# Altium PCB vfd_power_v2.PcbDoc
Units mil, origin at the board's own origin, x right, y up, seen from the top; angles counter-clockwise.
Board outline 6800 x 3920 mil, 2 copper layers (Top Layer, Bottom Layer); 84 components, 44 nets, 249 pads, 17 vias.
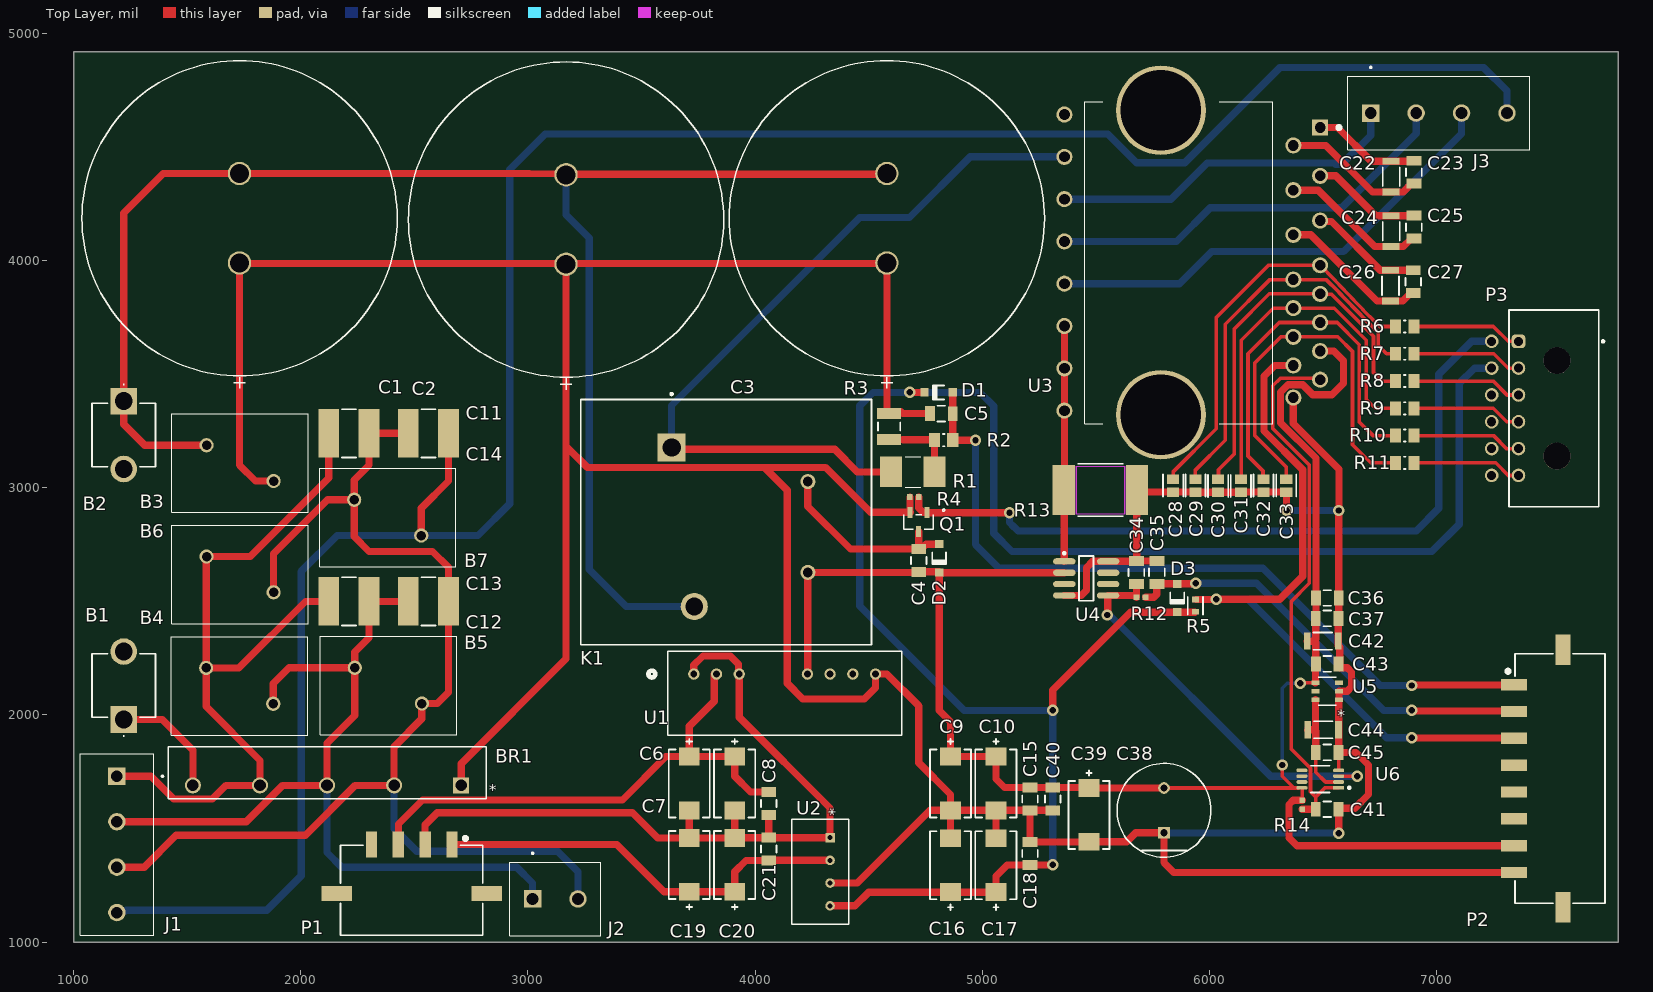
[diagram p0: Top Layer view]
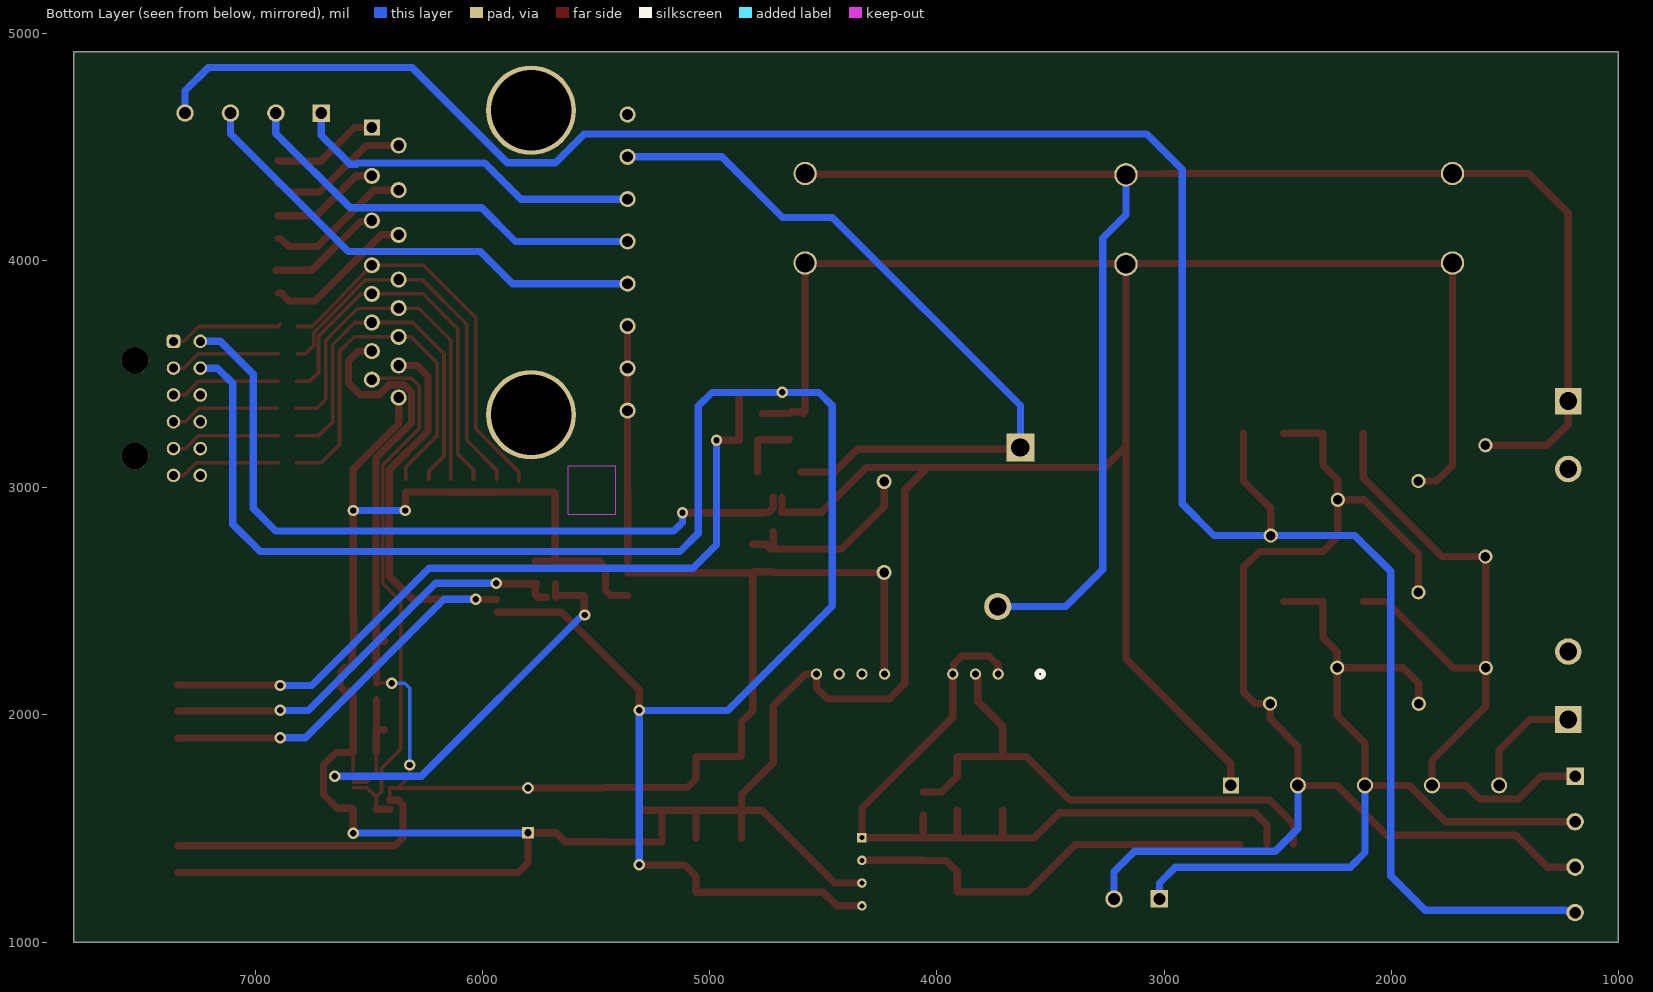
[diagram p1: Bottom Layer view, seen from below]
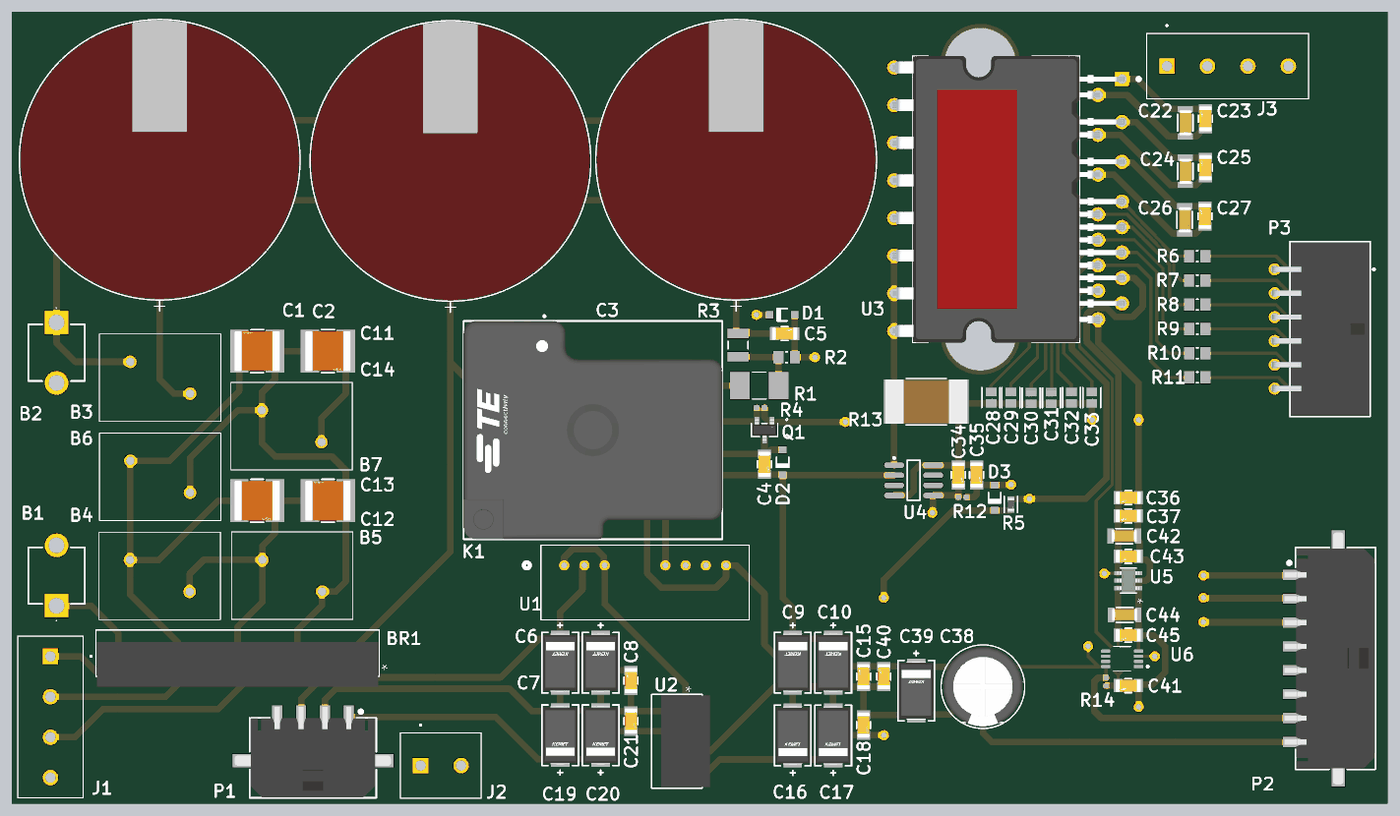
[diagram p2: 3D render of the assembled board from above, using the file's embedded part models]

## Layer stack, top to bottom
Top Solder: solder mask 0.4, Solder Resist, Dk 3.5
Top Layer: signal copper 1.4
Dielectric 1: dielectric 12.6, FR-4, Dk 4.8
Bottom Layer: signal copper 1.4
Bottom Solder: solder mask 0.4, Solder Resist, Dk 3.5

## Board outline
1000,1000 1000,4920 7800,4920 7800,1000

## Design rules (kind name [scope] priority, off if disabled: settings)
Clearance [All] p1: gap=5 ignorepadtopadclearanceinfootprint=FALSE
ComponentClearance [All] p1 off: gap=10 collisioncheckmode=3 verticalgap=10 showdistances=FALSE
DiffPairsRouting [All] p1: maxlimit=13 minlimit=13 mostfreqgap=13 toplayer_minwidth=7.42 toplayer_maxwidth=13 toplayer_prefwidth=7.42 bottomlayer_minwidth=7.42 bottomlayer_maxwidth=13 bottomlayer_prefwidth=7.42 maxuncoupledlength=500
FabricationTestPointUsage TestPointUsage [All] p1: valid=0 allowmultiple=FALSE
FabricationTestpoint Testpoint [All] p1: side=3 testpointundercomponent=TRUE minsize=40 maxsize=100 preferedsize=60 minholesize=20 maxholesize=40 preferedholesize=32 testpointgrid=1 allowsidetop=TRUE allowsidebottom=TRUE usegrid=TRUE gridtolerance=0.01
Height [All] p1 off: minheight=0 maxheight=1000 prefheight=500
HoleSize [All] p1: absolutevalues=TRUE maxlimit=800 minlimit=10 maxpercent=80.000 minpercent=20.000
MatchedLengths MatchedLengths_I210Rx [InNetClass('I210Rx')] p1: tolerance=5 checknetsindiffpair=FALSE checkdiffpairvsdiffpair=TRUE checkxsignals=TRUE checkothers=TRUE
MatchedLengths MatchedLengths_I210Tx [InNetClass('I210Tx')] p2: tolerance=5 checknetsindiffpair=FALSE checkdiffpairvsdiffpair=TRUE checkxsignals=TRUE checkothers=TRUE
MatchedLengths MatchedLengths_mSATARx [InNetClass('mSATARx')] p3: tolerance=25 checknetsindiffpair=FALSE checkdiffpairvsdiffpair=TRUE checkxsignals=TRUE checkothers=TRUE
MatchedLengths MatchedLengths_mSATATx [InNetClass('mSATATx')] p4: tolerance=25 checknetsindiffpair=FALSE checkdiffpairvsdiffpair=TRUE checkxsignals=TRUE checkothers=TRUE
MatchedLengths MatchedLengths_PCIECLK [InNetClass('PCIECLK')] p5: tolerance=25 checknetsindiffpair=FALSE checkdiffpairvsdiffpair=TRUE checkxsignals=TRUE checkothers=TRUE
MatchedLengths MatchedLengths_PCIETx [InNetClass('PCIETx')] p6: tolerance=5 checknetsindiffpair=FALSE checkdiffpairvsdiffpair=TRUE checkxsignals=TRUE checkothers=TRUE
MatchedLengths MatchedLengths_PCIERx [InNetClass('PCIERx')] p7: tolerance=5 checknetsindiffpair=FALSE checkdiffpairvsdiffpair=TRUE checkxsignals=TRUE checkothers=TRUE
MinimumSolderMaskSliver [All] p1: minsoldermaskwidth=5
PlaneConnect [All] p1: planeconnectstyle=Relief reliefexpansion=20 reliefentries=4 reliefconductorwidth=15 reliefairgap=10
PolygonConnect [All] p1: connectstyle=Direct reliefconductorwidth=20 reliefentries=4 polygonreliefangle="90 Angle" airgapwidth=30
RoutingVias [All] p1: holewidth=20 width=40 viastyle="Through Hole" minholewidth=15 minwidth=35 maxholewidth=28 maxwidth=50
SilkToSilkClearance [All] p1: silktosilkclearance=5
SilkToSolderMaskClearance SilkscreenOverComponentPads [IsPad] p1: minsilkscreentomaskgap=5 clearancetoexposedcopper=TRUE
SolderMaskExpansion [All] p1: expansion=4 istentingtop=FALSE
SupplyNets "Schematic Supply Nets_7" [InNet('PGND')] p1: voltage=0.000
SupplyNets "Schematic Supply Nets_6" [InNet('EGND')] p2: voltage=0.000
SupplyNets "Schematic Supply Nets_5" [InNet('15V')] p3: voltage=0.000
SupplyNets "Schematic Supply Nets_1" [InNet('3.3V')] p4: voltage=0.000
SupplyNets "Schematic Supply Nets_3" [InNet('ISO_5V')] p5: voltage=0.000
SupplyNets "Schematic Supply Nets_2" [InNet('ISO_15V')] p6: voltage=0.000
SupplyNets "Schematic Supply Nets" [InNet('GND')] p7: voltage=0.000
Width [All] p1: maxlimit=500 minlimit=5 preferedwidth=32 minimp=50.000000 maximp=50.000000 favimp=50.000000
20 further rules are at their usual default settings.

## Components (designator, comment, footprint, x,y, rotation, side; value= is the part's Value field where it differs from the comment)
B1 "FCLIP1" 01240061H 1220,1980 r90 top
B2 "FCLIP2" 01240061H 1220,3382 r270 top
B3 "470 V" TMOV14RP300E 1732.36,3030 r180 top
B4 "470 V" TMOV14RP300E 1732.36,2697.48 r0 top
B5 "470 V" TMOV14RP300E 2385.16,2207.89 r0 top
B6 "470 V" TMOV14RP300E 1730.64,2049.61 r180 top
B7 "470 V" TMOV14RP300E 2382.36,2790 r180 top
BR1 "GUO40-12NO1" SIP5-GUFP_LTF 2705.83,1690 r180 top
C1 "330 µF" CAP_C30_NCH 1730,3990 r90 top
C2 "330 µF" CAP_C30_NCH 3167.52,3984.19 r90 top
C3 "330 µF" CAP_C30_NCH 4580,3990 r90 top
C4 "0.1 µF" FP-CL31-IPC_C#1 4720,2680.25 r270 top
C5 "0.1 µF" FP-CL31-IPC_C#2 4819.75,3327 r0 top
C6 "47 µF" FP-T521X476M035ATE030-MFG 3710,1698.5 r90 top
C7 "47 µF" FP-T521X476M035ATE030-MFG 3910,1698.5 r90 top
C8 "0.1 µF" FP-CL31-IPC_C#1 4060,1610.25 r90 top
C9 "47 µF" FP-T521X476M035ATE030-MFG 4860,1698.5 r90 top
C10 "47 µF" FP-T521X476M035ATE030-MFG 5060,1698.5 r90 top
C11 "0.01 µF" FP-GRM55D-0_4-IPC_B 2211.4,3240 r180 top
C12 "0.01 µF" FP-GRM55D-0_4-IPC_B 2561.4,2500 r180 top
C13 "0.01 µF" FP-GRM55D-0_4-IPC_B 2211.4,2500 r0 top
C14 "0.01 µF" FP-GRM55D-0_4-IPC_B 2561.4,3240 r0 top
C15 "0.1 µF" FP-CL31-IPC_C#1 5210,1630.25 r90 top
C16 "47 µF" FP-T521X476M035ATE030-MFG 4860,1338.5 r270 top
C17 "47 µF" FP-T521X476M035ATE030-MFG 5060,1338.5 r270 top
C18 "0.1 µF" FP-CL31-IPC_C#1 5210,1390 r270 top
C19 "47 µF" FP-T521X476M035ATE030-MFG 3710,1340 r270 top
C20 "47 µF" FP-T521X476M035ATE030-MFG 3910,1340 r270 top
C21 "0.1 µF" FP-CL31-IPC_C#1 4060,1409.75 r270 top
C22 "10 µF" FP-CGA5L-0_3-0_1-IPC_B 6800.31,4370 r270 top
C23 "0.1 µF" FP-CL31-IPC_C#1 6900.31,4389.75 r90 top
C24 "10 µF" FP-CGA5L-0_3-0_1-IPC_B 6800.31,4130 r270 top
C25 "0.1 µF" FP-CL31-IPC_C#1 6900.31,4147.91 r90 top
C26 "10 µF" FP-CGA5L-0_3-0_1-IPC_B 6797.52,3889.97 r270 top
C27 "0.1 µF" FP-CL31-IPC_C#1 6897.52,3907.64 r90 top
C28 "47pF" FP-CL21-IPC_C 5840,3009.91 r270 top
C29 "47pF" FP-CL21-IPC_C 5938.38,3010 r270 top
C30 "47pF" FP-CL21-IPC_C 6038.38,3008.57 r270 top
C31 "47pF" FP-CL21-IPC_C 6138.38,3008.57 r270 top
C32 "47pF" FP-CL21-IPC_C 6238.38,3010 r270 top
C33 "47pF" FP-CL21-IPC_C 6338.38,3010 r270 top
C34 "0.1 µF" FP-CL31-IPC_C#1 5678.5,2627.41 r270 top
C35 "0.1 µF" FP-CL31-IPC_C#1 5768.5,2627.66 r270 top
C36 "0.1 µF" FP-CL31-IPC_C#1 6519.01,2514.92 r180 top
C37 "0.1 µF" FP-CL31-IPC_C#1 6518.51,2424.92 r180 top
C38 "220 µF" FP-RAD-TH-D_10_0_5-L_16_1-MFG 5800,1580 r90 top
C39 "47 µF" FP-T521X476M035ATE030-MFG 5470,1560 r90 top
C40 "0.1 µF" FP-CL31-IPC_C#1 5310,1630.25 r90 top
C41 "0.1 µF" FP-CL31-IPC_C#1 6518.51,1584.92 r180 top
C42 "10 µF" FP-CGA5L-0_3-0_1-IPC_B 6498.76,2324.92 r0 top
C43 "0.1 µF" FP-CL31-IPC_C#1 6518.76,2224.92 r180 top
C44 "10 µF" FP-CGA5L-0_3-0_1-IPC_B 6500.85,1934.92 r0 top
C45 "0.1 µF" FP-CL31-IPC_C#1 6518.51,1834.92 r180 top
D1 "1N4148W-7-F" DIOD-SOD123-2_V 4807.99,3420 r180 top
D2 "1N4148W-7-F" DIOD-SOD123-2_V 4810,2690 r270 top
D3 "1N4148W-7-F" DIOD-SOD123-2_V 5858.43,2514.57 r270 top
J1 "TB006_-508-04BE" "CUI_TB006 -508-04BE" 1190,1730 r270 top
J2 "TB006_-508-02BE" "CUI_TB006 -508-02BE" 3020,1190 r0 top
J3 "TB006_-508-04BE" "CUI_TB006 -508-04BE" 6710,4650 r0 top
K1 "T9AS1D12-15" FP-T9AS1D12-15-MFG 3872.07,2849.37 r90 top
P1 "662104145021" 662104145021 2487.98,1228.2 r0 top
P2 "662108145021" 662108145021 7543.15,1720 r90 top
P3 "66201221022" 66201221022 7516.22,3349.76 r90 top
Q1 "2N7002-TP" SOT-23_MCC 4720,2850 r180 top
R1 "CRS2512-FX-1004ELF" RESC6432X75N 4694.53,3070 r180 top
R2 "1 kΩ" RESC2013X60X30ML20T20 4829.65,3210 r0 top
R3 "10 kΩ" RESC3225X60X45NL20T20 4590,3270 r270 top
R4 "10 kΩ" RESC1005X40X25ML05T05 4700.31,2960 r0 top
R5 "82 kΩ" FP-RC0603-0_55-IPC_C 5938.43,2481.21 r270 top
R6 "22 Ω" RESC2013X60X30ML20T20 6859.68,3710 r180 top
R7 "22 Ω" RESC2013X60X30ML20T20 6859.65,3590 r180 top
R8 "22 Ω" RESC2013X60X30ML20T20 6860,3470 r180 top
R9 "22 Ω" RESC2013X60X30ML20T20 6860,3350 r180 top
R10 "22 Ω" RESC2013X60X30ML20T20 6860,3230 r180 top
R11 "22 Ω" RESC2013X60X30ML20T20 6860,3110 r180 top
R12 "10 kΩ" RESC1005X40X25ML05T05 5698.5,2517.91 r0 top
R13 "2.5 mΩ" RES_WSLP3921_.002OHM_VIS 5520,2990 r180 top
R14 "10 kΩ" RESC1005X40X25ML05T05 6408.76,1604.61 r90 top
U1 "TMR 2-2413WI" TMR2WI-SINGLE_TRP 3730,2180 r0 top
U2 "NKE0305SC" SIP_NKE_11P5X6_MUR 4330,1460 r270 top
U3 "IKCM30F60GDXKMA1" IC_IKCM30F60GDXKMA1 5924.53,3991.67 r270 top
U4 "MAX4080SASA+T" MAXM-S8+2_M 5457.59,2601.22 r0 top
U5 "LT6654BHS6-1.25TRMPBF" TSOT-23_S6_LIT 6518.76,2104.92 r180 top
U6 "TLV1702AIDGKR" FP-DGK0008A-IPC_C 6488.02,1717.72 r180 top

## Footprints (in the part's own frame and the unit in brackets; to place one, negate y for a bottom-side part, rotate by r counter-clockwise, add the part's x,y. Pads: shape width x height; smd on the part's side, far side on the other; paste and mask are expansions set on the pad)
01240061H [mm]
  rect 2.97x2.97 hole 1.98: 1(0,0)
  round 2.97 hole 1.98: 2(7.6,0)
  silkscreen extent -1.9,-3.55 7.36,3.55
66201221022 [mm] "Dual row Right angle header With plastic peg 12p"
  rrect50% 1.52x1.52 hole 1.02: 1(7.5,3.95)
  round 1.52 hole 1.02: 2(4.5,3.95) 3(1.5,3.95) 4(-1.5,3.95) 5(-4.5,3.95) 6(-7.5,3.95) 7(7.5,6.95) 8(4.5,6.95) 9(1.5,6.95) 10(-1.5,6.95) 11(-4.5,6.95) 12(-7.5,6.95)
  round 3 hole 3 unplated: MH1(-5.34,-0.35) MH2(5.34,-0.35)
  silkscreen extent -11,-5.62 11,5.02, body extent -10.85,-4.95 10.85,7.27, height 8.79
662104145021 [mm] "3.00mm Male Single Row Angled Header, 4p"
  rect 1.27x2.92 smd: 1(4.5,5.12) 2(1.5,5.12) 3(-1.5,5.12) 4(-4.5,5.12)
  rect 3.43x1.65 smd: MP1(-8.395,-0.35) MP2(8.395,-0.35)
  silkscreen extent -7.95,-5.02 7.95,6, body extent -9.82,-4.95 9.82,6.4, height 5.61
662108145021 [mm] "3.00mm Male Single Row Angled Header, 8p"
  rect 1.27x2.92 smd: 1(10.5,5.12) 2(7.5,5.12) 3(4.5,5.12) 4(1.5,5.12) 5(-1.5,5.12) 6(-4.5,5.12) 7(-7.5,5.12) 8(-10.5,5.12)
  rect 3.43x1.65 smd: MP1(-14.395,-0.35) MP2(14.395,-0.35)
  silkscreen extent -13.95,-5.02 13.95,6, body extent -15.82,-4.95 15.82,6.4, height 5.61
CAP_C30_NCH [mil]
  round 103 / inner round 60 / far side round 103 hole 83 paste-99999 mask+0: 1(0,0) 2(393.7,0)
  silkscreen extent -552,-694 891,694, body extent -492,-688 887,688, height 1261
"CUI_TB006 -508-02BE" [mm]
  rect 1.95x1.95 / inner round 1.95 / far side rect 1.95x1.95 hole 1.3: 1(0,0)
  round 1.95 hole 1.3: 2(5.08,0)
  silkscreen extent -2.54,-4.1 7.62,5.2
"CUI_TB006 -508-04BE" [mm]
  rect 1.95x1.95 / inner round 1.95 / far side rect 1.95x1.95 hole 1.3: 1(0,0)
  round 1.95 hole 1.3: 2(5.08,0) 3(10.16,0) 4(15.24,0)
  silkscreen extent -2.54,-4.1 17.78,5.2
DIOD-SOD123-2_V [mm] "SOD123, 2-Leads, Body 2.7x1.55mm, Height 1.45mm"
  rect 0.9x0.95 smd: 1(-1.575,0) 2(1.575,0)
  silkscreen extent -0.64,-0.83 0.64,0.78, body extent -1.35,-0.77 1.35,0.77, height 1.45
FP-CGA5L-0_3-0_1-IPC_B [mm]
  rect 0.756x1.906 smd paste+0 mask+0: 1(-1.725,0) 2(1.725,0)
  silkscreen extent -1.05,-0.95 1.05,0.95, body extent -2.35,-1.2 2.35,1.2, height 0.25
FP-CL21-IPC_C [mil]
  rect 41.52x53.39 smd paste+0 mask+0: 1(-28.57,0) 2(28.57,0)
  silkscreen extent -49,-44 49,44, body extent -53,-32 53,32, height 10
FP-CL31-IPC_C#1 [mil]
  rect 43.52x65.28 smd paste+0 mask+0: 1(-50.25,0) 2(50.25,0)
  silkscreen extent -17,-34 17,34, body extent -76,-38 76,38, height 10
FP-CL31-IPC_C#2 [mil]
  rect 43.52x65.28 smd paste+0 mask+0: 1(-50.25,0) 2(50.25,-1)
  silkscreen extent -17,-34 17,34, body extent -76,-38 76,38, height 10
FP-DGK0008A-IPC_C [mm]
  rect 1.257x0.418 smd paste+0 mask+0: 1(-2.051,0.975)
  rrect100% 1.257x0.418 smd paste+0 mask+0: 2(-2.051,0.325) 3(-2.051,-0.325) 4(-2.051,-0.975) 5(2.051,-0.975) 6(2.051,-0.325) 7(2.051,0.325) 8(2.051,0.975)
  silkscreen extent -3.35,-1.5 1.05,1.5, body extent -2.78,-1.6 2.78,1.6, height 0.25
FP-GRM55D-0_4-IPC_B [mil]
  rect 90.64x212.72 smd paste+0 mask+0: 1(-88.6,0) 2(88.6,0)
  silkscreen extent -31,-106 31,106, body extent -144,-116 144,116, height 10
FP-RAD-TH-D_10_0_5-L_16_1-MFG [mm]
  rect 1.3x1.3 hole 0.8 paste-2539.97 mask+0: 1(-2.5,0)
  round 1.3 hole 0.8 paste-2539.97 mask+0: 2(2.5,0)
  silkscreen extent -5.25,-5.25 5.25,5.25, body extent -5.35,-5.35 5.35,5.35, height 0.25
FP-RC0603-0_55-IPC_C [mil]
  rect 25.93x31.97 smd paste+0 mask+0: 1(-26.64,0) 2(26.64,0)
  silkscreen extent -40,-33 40,33, body extent -44,-22 44,22, height 10
FP-T9AS1D12-15-MFG [mm]
  rect 3.16x3.16 hole 2.06 paste-2539.97 mask+0: 1(8.335,6.095)
  round 3.03 hole 1.98 paste-2539.97 mask+0: 2(-9.445,3.555)
  round 1.69 hole 1.09 paste-2539.97 mask+0: 3(-5.635,-9.145) 4(4.525,-9.145)
  silkscreen extent -13.71,-16.25 14.44,16.25, body extent -13.81,-16.35 13.81,16.35, height 0.25
FP-T521X476M035ATE030-MFG [mm]
  rect 1.99x2.33 smd paste+0 mask+0: 1(-3.01,0) 2(3.01,0)
  silkscreen extent -3.8,-2.3 5,2.3, body extent -4.13,-2.42 4.13,2.42, height 0.25
IC_IKCM30F60GDXKMA1 [mm]
  rect 1.8x1.8 / inner round 1.8 / far side rect 1.8x1.8 hole 1.2: 1(-15.1,14.3)
  round 1.8 hole 1.2: 2(-13.1,11.3) 3(-9.7,14.3) 4(-8.1,11.3) 5(-4.7,14.3) 6(-3.1,11.3) 7(0.3,14.3) 8(1.9,11.3) 9(3.5,14.3) 10(5.1,11.3) 11(6.7,14.3) 12(8.3,11.3) 13(9.9,14.3) 14(11.5,11.3) 15(13.1,14.3) 16(15.1,11.3) 17(16.555,-14.3) 18(11.825,-14.3) 19(7.095,-14.3) 20(2.365,-14.3) 21(-2.365,-14.3) 22(-7.095,-14.3) 23(-11.825,-14.3) 24(-16.555,-14.3)
  round 10.016 hole 9 mask+0: 25(-17.025,-3.5) 26(17.025,-3.5)
  silkscreen extent -18,-12 18,16.6, body extent -18,-14.55 18,14.55, height 5.6
MAXM-S8+2_M [mm] "SOIC, 8-Leads, Body 4.90x3.90mm, Pitch 1.27mm, IPC Low Density"
  oval 2.5x0.7 smd: 1(-2.45,1.905) 2(-2.45,0.635) 3(-2.45,-0.635) 4(-2.45,-1.905) 5(2.45,-1.905) 6(2.45,-0.635) 7(2.45,0.635) 8(2.45,1.905)
  silkscreen extent -2.57,-2.5 0.8,2.93, body extent -2,-2.5 2,2.5, height 1.75
RES_WSLP3921_.002OHM_VIS [mil]
  rect 98x220 smd paste+0 mask+0: 1(-161,0) 2(161,0)
  Top Layer keep-out region: -107,-106 -107,106 105,106 105,-106
  Keep-Out Layer region: -105.5,-105.5 -105.5,105.5 105.5,105.5 105.5,-105.5
  silkscreen extent -100,-115 100,115, body extent -202,-110 202,110, height 47
RESC1005X40X25ML05T05 [mm] "Chip Resistor, 2-Leads, Body 1.00x0.50mm, IPC Low Density"
  rect 0.65x0.65 smd: 1(-0.5,0) 2(0.5,0)
  body extent -0.53,-0.27 0.53,0.28, height 0.4
RESC2013X60X30ML20T20 [mm] "Chip Resistor, 2-Leads, Body 2.00x1.25mm, IPC Low Density"
  rect 1.25x1.55 smd: 1(-1.025,0) 2(1.025,0)
  silkscreen extent -0.1,-0.67 0.1,0.67, body extent -1.1,-0.72 1.1,0.72, height 0.6
RESC3225X60X45NL20T20 [mm] "Chip Resistor, 2-Leads, Body 3.20x2.50mm, IPC Medium Density"
  rect 1.2x2.7 smd: 1(-1.45,0) 2(1.45,0)
  silkscreen extent -0.45,-1.25 0.45,1.25, body extent -1.7,-1.35 1.7,1.35, height 0.6
RESC6432X75N [mm]
  rect 2.46x3.42 smd: 1(-2.425,0) 2(2.425,0)
  silkscreen extent -0.87,-1.7 0.87,1.7
SIP5-GUFP_LTF [mil]
  rect 71x71 / inner round 60 / far side rect 71x71 hole 51 paste-99999 mask+0: 1(0,0)
  round 71 / inner round 60 / far side round 71 hole 51 paste-99999 mask+0: 2(295.28,0) 3(590.55,0) 4(885.83,0) 5(1181.1,0)
  silkscreen extent -109,-171 1291,59, body extent -104,-110 1286,110, height 1142
SIP_NKE_11P5X6_MUR [mil]
  rect 42x42 / inner round 60 / far side rect 42x42 hole 22 paste-99999 mask+0: 1(0,0)
  round 42 / inner round 60 / far side round 42 hole 22 paste-99999 mask+0: 2(100,0) 3(200,0) 4(300,0)
  silkscreen extent -82,-168 382,82, body extent -77,-120 377,120, height 304
SOT-23_MCC [mil]
  rect 22x48 smd paste+0 mask+0: 1(-37.5,-42) 2(37.5,-42) 3(0,42)
  silkscreen extent -115,-57 65,33, body extent -60,-52 60,52, height 49
TMOV14RP300E [mm]
  round 1.59 hole 1.06: 1(-3.75,0) 2(3.75,-4)
  silkscreen extent -7.62,-7.5 7.62,3.5
TMR2WI-SINGLE_TRP [mil]
  round 50 / inner round 60 / far side round 50 hole 30 paste-99999 mask+0: 1(0,0) 2(100,0) 3(200,0) 6(500,0) 7(600,0) 8(700,0) 9(800,0)
  silkscreen extent -200,-270 915,100
TSOT-23_S6_LIT [mil]
  rect 34.5x20 smd paste+0 mask+0: 1(-51.75,37.4) 2(-51.75,0) 3(-51.75,-37.4) 4(51.75,-37.4) 5(51.75,0) 6(51.75,37.4)
  silkscreen extent -40,-62 40,62, body extent -55,-57 55,57, height 39

## Part data
B1 B2: library part 01240061H, "Fuse Clip 40 A - 1 Circuit Cartridge Through Hole", Manufacturer_Name=LITTELFUSE, Mouser Part Number=576-01240061H, Datasheet Link=https://www.littelfuse.com/media?resourcetype=datasheets&itemid=281b065a-d81e-4e26-9035-84e73d4bb028&filename=littelfuse-fuse-clip-124-datasheet.pdf, Geometry.Height=10.67mm, Manufacturer_Part_Number=01240061H, Mouser Price/Stock=https://www.mouser.co.uk/ProductDetail/Littelfuse/01240061H?qs=81r%252BiQLm7BSgqEC6g%252BUS9Q%3D%3D
B3 B4 B5 B6 B7: library part TMOV14RP300E, "Var MOV 300VAC/385VDC 6000A 517V Thru-Hole Radial Bulk", Manufacturer_Name=LITTELFUSE, Mouser Part Number=576-TMOV14RP300E, Datasheet Link=https://www.littelfuse.com/~/media/electronics/datasheets/varistors/littelfuse_varistor_tmov_itmov_datasheet.pdf.pdf, Geometry.Height=22mm, Manufacturer_Part_Number=TMOV14RP300E, Mouser Price/Stock=https://www.mouser.co.uk/ProductDetail/Littelfuse/TMOV14RP300E?qs=nXjUL3qLHyUFvQrdNOF75Q%3D%3D
BR1: "No Description Available", Mfr_Name="Littelfuse Inc", RefDes=RefDes, Type=Type
C1 C2 C3: library part LGW2G331MELC30, "400V", Mfr_Name=Nichicon
C4 C5 C8 C15 C18 C21 C23 C25 C27 C34 C35 C36 C37 C40 C41 C43 C45: library part CMP-13271-001731-1, "Cap Ceramic 100nF 50V X7R ±10% SMD 1206 +125°C Embossed T/R", Capacitance=100nF, Case/Package=1206, Dielectric=X7R, Max Operating Temperature=125°C, Min Operating Temperature=-55°C, Package Quantity=15000, Tolerance=10%, Voltage=50V, Depth=1.6mm, Height=0.85mm, Lead Free="Lead Free", Length=3.2mm, Mount="Surface Mount", Packaging="Tape and Reel", Radiation Hardening=No, Thickness=0.037inch, Voltage Rating=50V, Voltage Rating (DC)=50V, Width=0.063inch
C6 C7 C9 C10 C16 C17 C19 C20 C39: library part CMP-03016-000019-1, "CAP TANT POLY 47UF 35V 2917 /  / 35V", Capacitance=47uF, Case Code (Imperial)=2917, Case Code (Metric)=7343, ESR (Equivalent Series Resistance)=30mR, Max Operating Temperature=125°C, Min Operating Temperature=-55°C, Package Quantity=1, Tolerance=20%, Voltage Rating=35V, Case/Package=2917, Construction=Flat, Depth=4.3mm, Dissipation Factor=10%, Features="General Purpose", Height=4mm, Height - Seated (Max)=0.169inch, Length=7.3mm, Life (Hours)=2000Hour, Mount="Surface Mount", Number of Pins=2, Packaging="Tape and Reel", Polarity=Polar, REACH SVHC="No SVHC", RoHS Compliant=Yes, Series="KO-CAP T521", Termination=SMD/SMT, Voltage Rating (DC)=35V, Width=4.3mm
C11 C12 C13 C14: library part CMP-06035-012355-1, "Chip Multilayer Ceramic Capacitors for General Purpose, 2220, 10000pF, U2J, -750ppm/°C, 5%, 1kV", Capacitance=10nF, Case Code (Imperial)=2220, Case Code (Metric)=5750, Dielectric=U2J, Max Operating Temperature=125°C, Min Operating Temperature=-55°C, Package Quantity=1000, Tolerance=5%, Voltage Rating=1kV, Case/Package=2220, Height=2mm, Length=0.224inch, Mount="Surface Mount", Packaging="Tape and Reel", Termination=SMD/SMT, Thickness=0.087inch, Voltage Rating (DC)=1kV, Width=0.197inch
C22 C24 C26 C42 C44: library part CMP-08246-000748-1, "Cap Ceramic 10uF 25V X7R 10% Pad SMD 1206 +125°C Automotive T/R", Capacitance=10uF, Case Code (Imperial)=1206, Case Code (Metric)=3216, Dielectric=X7R, Max Operating Temperature=125°C, Min Operating Temperature=-55°C, Package Quantity=2000, Ratings=AEC-Q200, Tolerance=10%, Voltage Rating=25V, Case/Package=1206, Composition=Ceramic, Depth=1.6mm, Height=1.6mm, Length=3.2mm, Mount="Surface Mount", Packaging="Tape and Reel", Termination=SMD/SMT, Thickness=0.071inch, Voltage Rating (DC)=25V, Weight=0.000571oz, Width=1.6mm
C28 C29 C30 C31 C32 C33: library part CMP-13271-002187-1, "CL21 Series 0805 47pF 50V ±5% Tolerance C0G Multilayer Ceramic Chip Capacitor", Case/Package=0805, Dielectric=C0G, Max Operating Temperature=125°C, Min Operating Temperature=-55°C, Package Quantity=10000, Temperature Coefficient=300ppm/°C, Tolerance=5%, Voltage=50V, Capacitance=47pF, Depth=1.25mm, Height=0.65mm, Length=2mm, Material=Ceramic, Mount="Surface Mount", Packaging="Tape and Reel", Radiation Hardening=No, Thickness=0.03inch, Voltage Rating=50V, Voltage Rating (DC)=50V, Width=0.049inch
C38: library part CMP-05427-000403-1, "Aluminum Electrolytic Capacitors (Radial Lead Type) 220uF ±20% 50V", Capacitance=220uF, Case/Package=Radial, ESR (Equivalent Series Resistance)=30mR, Max Operating Temperature=105°C, Min Operating Temperature=-40°C, Package Quantity=1, Ripple Current=1.65A, Tolerance=20%, Voltage Rating=50V, Contact Plating=Tin, Diameter=10mm, Features="General Purpose", Height=16mm, Height - Seated (Max)=0.689inch, Impedance=30mR, Lead Diameter=0.6mm, Lead Free="Lead Free", Lead Pitch=5mm, Length=16mm, Life (Hours)=8000Hour, Mount="Through Hole", Number of Pins=2, Packaging="Ammo Pack", Radiation Hardening=No, REACH SVHC="No SVHC", RoHS Compliant=Yes, Series=FR, Termination=Radial, Voltage Rating (DC)=50V
D1 D2 D3: library part CMP-2000-04932-2, "Fast Switching Diode, 100 V, 0.15 A, -65 to 150 degC, 2-Pin?SOD123, RoHS, Tape and Reel", If - Forward Current=0.15A, Ir - Reverse Current=1uA, Manufacturer=DiodesIncorporated, Max Surge Current=2A, Maximum Operating Temperature=+150C, Minimum Operating Temperature=-65C, Operating Temperature Range=-65Cto+150C, Package / Case=SOD-123, Package Reference=SOD123-2, Peak Reverse Voltage=100V, Vf - Forward Voltage=1.25V, Brand=DiodesIncorporated, Configuration=Single, Datasheet URL=http://www.farnell.com/datasheets/1915529.pdf, Datasheet Version="Rev. 24-2, 10/2013", Factory Pack Quantity=3000, Height=1.25mm, Length=2.85mm, Manufacturer URL=http://www.diodes.com/, Mounting Style=SMD/SMT, Package URL=http://www.diodes.com/datasheets/ds18004.pdf, Packaging=Reel, Product=SwitchingDiodes, Product Category=Diodes-GeneralPurpose,Power,Switching, Recovery Time=4ns, RoHS=True, Series=1N4148, Type=SwitchingDiode, Unit Weight=0.000353oz, Width=1.7mm
J1 J2 J3: "2~24 Poles, Screw Type, Horizontal, 5.08 Pitch, 26~14 (AWG), Terminal Block Connector", Package=None, Availability="In Stock", CUI_purchase_URL=https://www.cuidevices.com/product/interconnect/connectors/terminal-blocks/tb006-508-series?utm_source=snapeda.com&utm_medium=referral&utm_campaign=snapedaBOM, MF="CUI Devices", Price=None
  J1 J3: Check_prices=https://www.snapeda.com/parts/TB006%20-508-04BE/CUI+Devices/view-part/?ref=eda, MP="TB006 -508-04BE", Purchase-URL="https://pricing.snapeda.com/search/part/TB006 -508-04BE/?ref=eda", SnapEDA_Link=https://www.snapeda.com/parts/TB006%20-508-04BE/CUI+Devices/view-part/?ref=snap
  J2: Check_prices=https://www.snapeda.com/parts/TB006%20-508-02BE/CUI+Devices/view-part/?ref=eda, MP="TB006 -508-02BE", Purchase-URL="https://pricing.snapeda.com/search/part/TB006 -508-02BE/?ref=eda", SnapEDA_Link=https://www.snapeda.com/parts/TB006%20-508-02BE/CUI+Devices/view-part/?ref=snap
K1: library part CMP-03395-000224-1, "RELAY GEN PURPOSE SPST 30A 15V", Coil Current=67mA, Coil Power=1W, Coil Resistance=225R, Coil Voltage (DC)=15V, Contact Current Rating=30A, Contact Voltage Rating (AC)=277V, Max Operating Temperature=85°C, Min Operating Temperature=-55°C, Package Quantity=50, Coil Type=Non-Latching, Contact Material=Silver, Depth=27.43mm, ELV=Non-Compliant, Height=20.4mm, Lead Free="Lead Free", Length=32.5mm, Max Voltage Rating (AC)=277V, Mount="Through Hole", Number of Pins=4, Operate Time=15ms, Packaging=Bulk, Power Consumption=1W, Radiation Hardening=No, Relay Type="General Purpose", Release Time=15ms, RoHS Compliant=Yes, Series=T9A, Termination=PCB, Throw Configuration=SPST, Weight=0.918oz, Width=27.4mm
P1: library part CMP-1502-00484-2, Color=Black, Contact Resistance=10mΩ, Current Rating=5A, Insulation Resistance=1GΩ, Max Operating Temperature=105°C, Min Operating Temperature=-40°C, Operating Supply Voltage=250V, Connector Type="Male Pin, Socket", Contact Material=Copper, Contact Plating=Tin, Fastening Type=Ramp, Gender=Male, Height=14mm, Lead Pitch=3mm, Length=15.65mm, Mount="Surface Mount", NexarPartId=23024783, Number of Contacts=4, Number of Pins=4, Number of Positions=4, Number of Rows=1, Packaging="Tape and Reel", Pitch=3mm, REACH SVHC=Unknown, RoHS=Compliant, Termination=Solder, Width=6.85mm
P2: library part CMP-1502-00488-2, Color=Black, Contact Resistance=10mΩ, Current Rating=5A, Insulation Resistance=1GΩ, Max Operating Temperature=105°C, Min Operating Temperature=-40°C, Operating Supply Voltage=250V, Connector Type="Male Pin, Socket", Contact Material=Copper, Contact Plating=Tin, Fastening Type=Ramp, Gender=Male, Height=14mm, Lead Pitch=3mm, Length=27.65mm, Mount="Surface Mount", NexarPartId=23024787, Number of Contacts=8, Number of Pins=8, Number of Positions=8, Number of Rows=1, Packaging="Tape and Reel", Pitch=3mm, REACH SVHC=Unknown, RoHS=Compliant, Termination=Solder, Width=12.85mm
P3: library part CMP-1502-00369-2, Color=Black, Contact Resistance=10mΩ, Current Rating=5A, Insulation Resistance=1GΩ, Max Operating Temperature=105°C, Min Operating Temperature=-40°C, Operating Supply Voltage=250V, Connector Type="Male Pin, Socket", Contact Material=Copper, Contact Plating=Tin, Fastening Type=Latch, Gender=Male, Height=8.9mm, Lead Pitch=3mm, Length=21.7mm, Mount="Through Hole", NexarPartId=23024718, Number of Contacts=12, Number of Pins=12, Number of Positions=12, Number of Rows=2, Pitch=3mm, REACH SVHC=Unknown, RoHS=Compliant, Row Spacing=2.9972mm, Termination=Solder, Width=21.7mm
Q1: "No Description Available", Mfr_Name=MCC, Type=Transistors
R1: Package=None, Availability=Unavailable, MP=CRS2512-FX-1004ELF, Price=None
R2: library part CMP-2001-04656-1, "±5%", Manufacturer="KOA Speer", Part Number=RK73B2ATTD102J
R3: library part CMP-2005-01993-1, "±1%, 0.5W", Manufacturer="Vishay Dale", Part Number=CRCW121010K0FKEA
R4 R12 R14: library part CMP-2002-01181-1, "±5%", Manufacturer=Panasonic, Part Number=ERT-J0EM103J
R5: library part CMP-03412-048229-1, "RES 82K OHM 5% 1/10W 0603", Case Code (Imperial)=0603, Case Code (Metric)=1608, Max Operating Temperature=155°C, Max Power Dissipation=100mW, Min Operating Temperature=-55°C, Package Quantity=1, Resistance=82kR, Resistance Tolerance=5%, Resistor Type="Thick Film", Temperature Coefficient=100ppm/°C, Voltage Rating=75V, Voltage Rating (DC)=50V, Case/Package=0603, Construction=Rectangular, Depth=0.8mm, Features="Moisture Resistant", Height=0.022inch, Lead Free="Lead Free", Length=0.063inch, Military Standard=Not, Number of Pins=2, Number of Terminations=2, Packaging="Tape and Reel", Power Rating=100mW, REACH SVHC="No SVHC", RoHS Compliant=Yes, Series=RC, Size Code=0603, Termination=SMD/SMT, Tolerance=5%, Weight=7.1E-05oz, Width=0.8mm
R6 R7 R8 R9 R10 R11: library part CMP-2001-04578-1, Manufacturer="KOA Speer", Part Number=RK73B2ATTD220J
R13: library part WSLP39212L500FEA, "±1%, 5W", Mfr_Name=Vishay
U1: library part CMP-01539-55835505-1, "TMR 2-2413WI Module DC-DC 24VIN 1-OUT 15V 135A 2W 7-Pin SIP", Case/Package=SIP, Isolation Voltage=1.5kV, Max Operating Temperature=85°C, Min Operating Temperature=-40°C, Nominal Input Voltage=24V, Output Current=135A, Output Power=2W, Output Voltage=15V, Depth=9.3mm, Isolation=Isolated, Length=26mm, Mount="Through Hole", NexarPartId=55835505, Number of Outputs=1, Number of Pins=7, Radiation Hardening=No, RoHS=Compliant
U2: "No Description Available", Mfr_Name=Murata, RefDes=RefDes, Type=Type
U3: "Fully isolated Dual In-Line molded module", Package="PowerDIP-24 Infineon", Availability="In Stock", Check_prices=https://www.snapeda.com/parts/IKCM30F60GDXKMA1/Infineon+Technologies/view-part/?ref=eda, MF="Infineon Technologies", MP=IKCM30F60GDXKMA1, Price=None, Purchase-URL=https://pricing.snapeda.com/search?q=IKCM30F60GDXKMA1&ref=eda, SnapEDA_Link=https://www.snapeda.com/parts/IKCM30F60GDXKMA1/Infineon+Technologies/view-part/?ref=snap
U4: library part CMP-0252-00176-1, "76 V, High-Side, Uni-directional Current-Sense Amplifier, 60 V / V Gain, -40 to 125 degC, 8-Pin SOIC (S8+2), Pb-Free, Tape and Reel", Bi-Dir. Curr. Sense=No, Code_JEDEC=MS012, ComponentLink1Description="Manufacturer URL", ComponentLink1URL=http://www.maximintegrated.com/, ComponentLink2Description=Datasheet, ComponentLink2URL=http://datasheets.maximintegrated.com/en/ds/MAX4080-MAX4081.pdf, ComponentLink3Description="Package Specification", ComponentLink3URL=http://pdfserv.maximintegrated.com/package_dwgs/21-0041.PDF, DatasheetVersion="Rev. 4", Gain="5 V/V, 20 V/V ,60 V/V", Industry Qualified="Automotive - AECQ100, Automotive - General", Mounting Technology="Surface Mount", PackageDescription="8-Pin Small-Outline IC, Narrow (0.15in) (S8+2), Body 4.90 x 3.90 mm, Pitch 1.27 mm", PackageReference=S8+2, PackageVersion="Rev. D, 10/2012", PartNumber=MAX4080SASA+T
U5: "No Description Available", Mfr_Name="Analog Devices Inc", RefDes=RefDes, Type=Type
U6: library part CMP-04896-000101-1, "IC COMPARATOR DUAL 8VSSOP", Case/Package=VSSOP, Input Bias Current=15nA, Input Offset Voltage (Vos)=3.5mV, Max Dual Supply Voltage=18V, Max Operating Temperature=125°C, Max Supply Voltage=36V, Min Dual Supply Voltage=1.1V, Min Operating Temperature=-40°C, Min Supply Voltage=2.2V, Nominal Supply Current=55uA, Output Current=20mA, Package Quantity=2500, Power Supply Rejection Ratio (PSRR)=-96.48dB, Quiescent Current=75uA, Contact Plating=Gold, Lead Free="Lead Free", Max Input Current=15nA, Mount="Surface Mount", Number of Channels=2, Number of Elements=2, Number of Pins=8, Packaging="Tape and Reel", Propagation Delay=560ns, REACH SVHC="No SVHC", Response Time=780ns, RoHS Compliant=Yes, Series=-, Type="General Purpose"

## Via types
v1: diameter 50, hole 28, Top Layer to Bottom Layer, 17 vias

## Nets (pads, with @x,y where several pads share a name; then routed paths per layer and width w, separated by ;. In a path a pad name is that pad's centre, name@x,y a point inside that pad or via, vN(x,y) a via of type N, cw(c..) or ccw(c..) an arc to the next point about the centre after c; other vN are vias at no path point)
3.3V: C19.2 C20.2 C21.2 P1.1 U2.2 | length 1860.3
  Top Layer w32: P1.1 3390.22,1429.78 3598.5,1221.5 C19.2 C20.2 3910,1310 3959.5,1359.5 C21.2 4060.5,1360 U2.2
15V: C6.2 C7.2 C8.2 P1.3 U1.2 | length 2360.9
  Top Layer w32: P1.3@2430,1429.78 2430,1520 2536,1626 3416,1626 3607.01,1817.01 C6.2 3710,1950 3820,2060 U1.2@3820,2180 ; C6.2@3716.69,1817.01 C7.2 3910,1730 3979.5,1660.5 C8.2
+_VIN: B1.1 BR1.5 | length 515.8
  Top Layer w32: B1.1 1390,1980 1524.72,1845.28 BR1.5
EGND: B7.1 C14.2 J1.4 J3.4 | length 10052.3
  Top Layer w32: B7.1 2530,2910 2650,3030 C14.2
  Bottom Layer w32: J1.4 1198.57,1138.57 1229.7,1138.57 1231.13,1140 1850,1140 2002.12,1292.12 2002.12,2632.12 2160,2790 B7.1 2780,2790 2920,2930 2920,4401.25 3076.21,4557.47 5552.53,4557.47 5678.81,4431.19 5891.19,4431.19 6310,4850 7208.12,4850 7310,4748.12 J3.4
GND: C6.1 C7.1 C8.1 C19.1 C20.1 C21.1 P1.2 U1.1 U1.3 U2.1 | length 3480.8
  Top Layer w32: P1.2 2547.04,1517.04 2600,1570 3460,1570 3571.49,1458.51 C19.1 ; C6.1 C19.1 ; U1.1 3730,2220 3770,2260 3890,2260 3926.56,2223.44 3926.56,2183.44 U1.3 3930,1990 4330,1590 U2.1 C21.1 ; C7.1 C20.1 ; C8.1 C21.1 ; C19.1 C20.1 ; C20.1 3911.5,1460 C21.1
HIN(U): C28.1 R6.2 U3.7 | length 1795.6
  Top Layer w16: C28.1@5840,3030 C28.1 5840,3070 6030,3260 6030,3750 6259.85,3979.85 U3.7 6488.4,3980.7 6493.07,3976.03 6699.48,3760 6699.6,3759.88 ; 6699.6,3759.87 6704.29,3755.19 6749.48,3710 R6.2@6816.38,3710
HIN(V): C29.1 R7.2 U3.8 | length 1733.5
  Top Layer w16: C29.1 5938.38,3078.38 6070,3210 6070,3720 6266.86,3916.86 U3.8 6491.81,3916.86 6513.32,3916.86 6535.15,3895.03 6535.66,3895.03 6541.57,3889.12 6709.44,3716.92 6710.38,3715.93 6710.51,3715.8 6727.62,3698.68 6729.07,3697.25 6731.63,3694.72 6743.26,3683.09 6743.26,3626.74 6780,3590 R7.2@6816.34,3590
HIN(W): C30.1 R8.2 U3.9 | length 1718.1
  Top Layer w16: C30.1@6039.7,3037.15 6039.7,3079.7 6110,3150 6110,3700 6263.87,3853.87 U3.9 6488.97,3852.42 6537.58,3852.42 6722.26,3667.74 6722.26,3507.74 6760,3470 R8.2
ISO_5V: C16.2 C17.2 C18.2 D1.2 D3.2 P3.8 R5.2 U2.4 | length 8744.4
  Top Layer w10: C18.2 C18.2@5210.25,1340
  Top Layer w32: U2.4 4440,1160 4500,1220 C16.2 C17.2 5060,1290 5109.75,1339.75 C18.2 ; v1(4680,3420) D1.2 ; C18.2@5210.25,1340 v1(5310,1340) ; v1(5310,2020) 5310,2110 5652.56,2452.56 D3.2 R5.2@5936.42,2452.56
  Bottom Layer w32: v1(5310,1340) v1(5310,2020) 4920,2020 4460,2480 4460,3360.89 4519.11,3420 v1(4680,3420) 4990,3420 5050,3360 5050,2800 5130.67,2719.33 6979.33,2719.33 7100,2840 7100,3460 7166.93,3526.93 P3.8
ISO_15V: C4.2 C9.2 C10.2 C15.2 C36.2 C37.2 C38.2 C39.2 C40.2 C42.1 C43.2 D2.2 K1.3 P2.7 R14.2 U1.6 U3.13 U4.2 U5.4 U6.8 | length 7912.4
  Top Layer w10: D2.2 D2.2@4811.77,2626.22
  Top Layer w16: C38.2 U6.8@6389.74,1678.43 ; v1@6320.45,1779.55 6320.45,1730 6371.03,1679.42 6406.07,1679.42 U6.8@6406.37,1679.12 ; v1@6401.16,2141.16 U5.4@6465.85,2141.16 ; U6.8@6408.18,1678.43 6408.76,1677.85 R14.2
  Top Layer w32: U1.6 4231.06,2181.06 4231.06,2626.47 K1.3 4717.52,2627.52 C4.2 4807.99,2630 D2.2 4810,2020 4860,1970 C9.2 C10.2 5060,1718.19 5097.69,1680.5 C15.2 C40.2 5468.01,1680.5 C39.2 5470.08,1678.43 C38.2 ; D2.2@4811.77,2626.22 U4.2 ; v1(6320,1780) v1@6320.45,1779.55 ; v1(6400,2140) v1@6401.16,2141.16 ; R14.2 6368.75,1624.29 6350,1605.55 6350,1460 6385.28,1424.72 P2.7 ; C42.1 6458.76,2324.92 ; U5.4@6465.85,2141.16 U5.4 6467.01,2223.46 C43.2 6468.49,2319.06 6462.63,2324.92 6458.76,2324.92 ; U3.13 6548.1,3601.9 6590,3560 6590,3460 6540,3410 6455.01,3410 6411.4,3453.61 6346.04,3453.61 6312.98,3420.55 6312.98,3287.02 6468.76,3131.24 C36.2 6468.76,2425.42 C37.2 6468.26,2334.42 6458.76,2324.92
  Bottom Layer w16: v1(6320,1780) 6320,2117.45 6342.55,2140 v1(6400,2140)
ITRIP: C41.2 R14.1 U3.15 U6.1 | length 2410.6
  Top Layer w16: C41.2 6468.26,1638.9 ; U3.15 6480.83,3482.61 6312.61,3482.61 6278.86,3448.86 6278.86,3261.14 6439.76,3100.24 6439.76,2579.76 6360,2500 6360,1849.91 6445.01,1764.9 6445.01,1662.15 6468.26,1638.9 ; U6.1 6508.69,1679.33 6468.26,1638.9
  Top Layer w32: R14.1 C41.2
ITRIP+: C34.2 R12.1 U4.5 U6.3 | length 1750.3
  Top Layer w16: U6.3 v1@6649.49,1730.51
  Top Layer w32: v1(5550,2440) 5552.02,2442.02 5552.02,2524.2 U4.5 5670.51,2526.22 R12.1 5678.82,2576.84 C34.2
  Bottom Layer w32: v1(5550,2440) 5554.87,2440 5563.87,2431 5569,2431 6270,1730 v1(6650,1730)
LIN(U): C31.1 R9.2 U3.10 | length 1688.7
  Top Layer w16: C31.1@6140,3037.15 6140,3650 6280.88,3790.88 U3.10 6549.12,3790.88 6690,3650 6690,3390 6730,3350 R9.2@6822.6,3350
LIN(V): C32.1 R10.2 U3.11 | length 1689
  Top Layer w16: C32.1 6236.04,3040.91 6236.04,3073.96 6170,3140 6170,3590 6307.89,3727.89 U3.11 6562.11,3727.89 6660,3630 6660,3290 6720,3230 R10.2@6816.69,3230
LIN(W): C33.1 R11.2 U3.12 | length 1706
  Top Layer w16: C33.1 6338.38,3091.62 6200,3230 6200,3550 6314.89,3664.89 U3.12 6565.11,3664.89 6630,3600 6630,3190 6710,3110 R11.2
NetB2_1: B2.1 B3.2 C1.2 C2.2 C3.2 K1.2 | length 7080.6
  Top Layer w32: B3.2 1312.52,3187.48 1220,3280 B2.1 1220,4210 1393.7,4383.7 C1.2 3005.16,4383.7 3163.56,4381.85 C2.2 3170.43,4380.79 4577.09,4380.79 C3.2 ; K1.2@3730.88,2478.76 K1.2
  Bottom Layer w32: C2.2 3167.52,4202.48 3270,4100 3270,2640 3432.48,2477.52 K1.2
NetC4_1: C4.1 D2.1 K1.4 Q1.3 | length 851.5
  Top Layer w32: K1.4 4232.11,2917.89 4419.5,2730.5 C4.1 ; Q1.3 C4.1 ; D2.1 4752.39,2752.01 4730.88,2730.5 C4.1
NetC44_1: C44.1 C45.2 U5.6 U6.2 | length 471.6
  Top Layer w16: C45.2 6468.26,1748.07 6511.41,1704.92 U6.2
  Top Layer w32: C44.1 6462.4,1934.92 ; U5.6 6467.01,1939.53 6462.4,1934.92 ; C45.2 6468.26,1929.06 6462.4,1934.92
NetR1_1: R1.1 R2.1 R3.2 | length 280.8
  Top Layer w32: 4650,3212.91 4651.46,3211.46 4787.83,3211.46 R2.1 4789.29,3070.71 R1.1
NU_NV_NW_RS+: R13.2 U3.17 U3.18 U3.19 U4.1 | length 1038.1
  Top Layer w10: R13.2@5361.14,2987.86 R13.2 R13.2@5361.54,2992.54
  Top Layer w32: U4.1 R13.2@5361.14,2987.86 ; R13.2@5361.54,2992.54 U3.17 U3.18 U3.19
OUT0: P3.1 R6.1 | length 501.3
  Top Layer w16: R6.1@6890.35,3719.68 R6.1 7250,3710 7314.96,3645.04 P3.1
OUT1: P3.2 R7.1 | length 486.8
  Top Layer w16: R7.1 7251.9,3590 7314.97,3526.93 P3.2
OUT2: P3.3 R8.1 | length 485.7
  Top Layer w16: R8.1 7249.24,3470 7310.42,3408.82 P3.3
OUT3: P3.4 R9.1 | length 482
  Top Layer w16: R9.1@6903.31,3350 7250,3350 7309.29,3290.71 P3.4
OUT4: P3.5 R10.1 | length 484.1
  Top Layer w16: R10.1 7250.39,3230 7307.8,3172.6 P3.5
OUT5: P3.6 R11.1 | length 486.3
  Top Layer w16: R11.1@6897.4,3110 7260,3110 7315.51,3054.49 P3.6
OUT6: P3.7 Q1.1 R4.2 | length 3325.2
  Top Layer w32: R4.2 4720,2911.33 4739.83,2891.5 4758,2891.5 Q1.1 ; Q1.1@4762.5,2890 v1(5120,2890)
  Bottom Layer w32: v1(5120,2890) 5120,2847.49 5138.75,2828.75 5140,2828.75 5158.75,2810 6910,2810 7010,2910 7010,3500 7155.04,3645.04 P3.7
P: K1.1 R1.2 U3.23 | length 3379.1
  Top Layer w32: K1.1 3639.64,3170 4350,3170 4450,3070 R1.2
  Bottom Layer w32: K1.1 3632.11,3362.11 4460,4190 4680,4190 4947.22,4457.22 U3.23
PGND: B3.1 BR1.1 C1.1 C2.1 C3.1 C5.1 C9.1 C10.1 C15.1 C16.1 C17.1 C18.1 C28.2 C29.2 C30.2 C31.2 C32.2 C33.2 C34.1 C35.1 C36.1 C37.1 C38.1 C39.1 C40.1 C41.1 C42.2 C43.1 C44.2 C45.1 P2.8 Q1.2 R3.1 R4.1 R13.1 U1.9 U2.3 U3.16 U4.4 U4.8 U5.1 U5.2 U6.4 | length 19944.6
  Top Layer w10: R4.1 R4.1@4681.56,2959.07 ; Q1.2@4681.56,2892.93 Q1.2 ; C34.1 5678.63,2677.78 C34.1@5679.5,2678.66 ; R13.1@5681,2980 R13.1
  Top Layer w16: U6.4 C45.1@6568.76,1824.04
  Top Layer w32: B3.1 1800,3030 1730,3100 C1.1 1732.91,3987.09 3164.61,3987.09 C2.1 ; BR1.1 2705.83,1785.83 3167.52,2247.52 3167.52,3183.05 ; U2.3 4450,1260 4770,1580 C9.1 ; R3.1 4587.62,3327.09 R3.1@4580,3334.71 ; Q1.2@4681.56,2892.93 R4.1@4681.56,2959.07 ; Q1.2 4508,2892 4310,3090 4040,3090 ; C5.1 C5.1 4650.04,3327.04 4642.38,3334.71 R3.1@4580,3334.71 ; C16.1 C9.1 ; C17.1 C10.1 ; C40.1@5309.68,1580.32 C40.1 C15.1 ; U4.4 5436.22,2526.22 5458.69,2548.69 5458.69,2648.69 5486.22,2676.22 U4.8 C34.1@5677.07,2676.22 ; C39.1 5468.75,1440.25 C18.1 C15.1 ; C39.1@5476.69,1441.5 5635.56,1441.5 5675.64,1481.57 C38.1 5800,1350 5843.39,1306.61 P2.8 ; C34.1@5678.63,2677.78 5768.38,2677.78 C35.1 ; C34.1@5679.5,2678.66 5679.5,2977.09 5683.75,2981.33 C28.2 5840.05,2981.38 5938.33,2981.38 C29.2 5939.8,2980 C30.2 C31.2 6139.8,2981.43 C32.2 C33.2 6339.19,2980.61 6339.19,2900.81 v1(6340,2900) ; U3.16 6369.41,3282.91 6570,3082.33 v1(6570,2900) 6569.63,2899.63 6569.63,2515.29 C36.1 6569.26,2425.42 C37.1 6566.67,2422.84 C42.2 6566.67,2304.51 6573.42,2297.77 6573.42,2229.33 C43.1 ; C43.1@6569.01,2214.04 6574.77,2208.28 6606.42,2208.28 6625.16,2189.53 6625.16,2123.67 6606.42,2104.92 U5.2 U5.1 6568.76,2065.77 C44.2 C45.1 6645.08,1834.92 6700,1780 6700,1650 6639.78,1589.78 6573.62,1589.78 C41.1 6569.38,1584.3 6569.38,1480.62 v1(6570,1480) ; 3167.52,3183.05 C2.1 ; 3167.52,3183.05 3260.57,3090 4040,3090 ; C2.1 3170.43,3987.09 4577.09,3987.09 C3.1 R3.1@4580,3334.71 ; 4040,3090 4140.78,2989.22 4140.78,2139.22 4210,2070 4480,2070 4530,2120 U1.9 4580,2180 4720,2040 4720,1790 4860,1650 C9.1 ; C9.1 C10.1 ; C10.1 C15.1
  Bottom Layer w32: C38.1@5800,1480 v1(6570,1480) ; v1(6340,2900) v1(6570,2900)
U: J3.1 U3.22 | length 1568
  Bottom Layer w32: U3.22 5831,4271 5989.99,4429.99 6549.99,4429.99 6555.94,4424.04 6582.45,4424.04 6710,4551.59 J3.1
V: J3.2 U3.21 | length 1835.3
  Bottom Layer w32: U3.21 5854.78,4084.78 6003.14,4233.14 6583.14,4233.14 6910,4560 J3.2
VB(U): C22.2 C23.1 U3.2 | length 631.9
  Top Layer w32: U3.2 6512.59,4507.41 6717.91,4302.09 6852.84,4302.09 6872.67,4321.92 6872.67,4322.74 6889.43,4339.5 C23.1
VB(V): C24.2 C25.1 U3.4 | length 648.6
  Top Layer w32: U3.4 6479.44,4310.56 6727.91,4062.09 6853.86,4062.09 6889.43,4097.66 C25.1
VB(W): C26.2 C27.1 U3.6 | length 663.6
  Top Layer w32: U3.6 6446.29,4113.71 6737.94,3822.06 C26.2 6851.31,3822.06 6886.64,3857.39 C27.1
VFO_VIN3: P2.3 R5.1 U3.14 | length 3177.7
  Top Layer w32: R5.1 v1@6027.86,2507.86 ; v1(6030,2510) 6310,2510 6410.76,2610.76 6410.76,3079.24 6240,3250 6240,3491.25 6287.66,3538.91 U3.14 ; v1(6890,1900) 6891.42,1898.58 7340.16,1898.58 P2.3
  Bottom Layer w32: v1(6030,2510) 6170,2510 6780,1900 v1(6890,1900)
VIN1: C5.2 D1.1 P2.1 R2.2 | length 3399.8
  Top Layer w32: D1.1 C5.2 R2.2 v1(4970,3210) ; v1(6890,2130) 6891.69,2131.69 7339.88,2131.69 P2.1
  Bottom Layer w32: v1(4970,3210) 4970,2750 5074,2646 6235.87,2646 6751.87,2130 v1(6890,2130)
VIN2: C35.2 D3.1 P2.2 R12.2 | length 1915.7
  Top Layer w32: R12.2 5755.1,2517.91 5768.5,2531.31 C35.2 ; C35.2@5763.55,2577.41 C35.2 ; v1(5940,2580) 5938.29,2578.29 5860.14,2578.29 D3.1 5857.61,2577.41 C35.2 ; v1(6890,2020) 6892.36,2017.64 7339.21,2017.64 P2.2
  Bottom Layer w32: v1(5940,2580) 6207.67,2580 6767.67,2020 v1(6890,2020)
VS(U): C22.1 C23.2 U3.1 | length 474.2
  Top Layer w32: U3.1 6563.85,4586.15 6712.09,4437.91 C22.1 C23.2@6889.43,4437.91 ; C23.2@6889.43,4440 C23.2
VS(V): C24.1 C25.2 U3.3 | length 486
  Top Layer w32: U3.3 6556.44,4373.56 6732.09,4197.91 C24.1 6900.06,4197.91 C25.2@6900.53,4198.38
VS(W): C26.1 C27.2 U3.5 | length 515.1
  Top Layer w32: U3.5 6491.63,4172.6 6537.4,4172.6 6752.11,3957.89 C26.1 6890,3957.89 C27.2@6908.4,3957.89 ; C27.2 C27.2@6901.09,3957.89
W: J3.3 U3.20 | length 2112.9
  Bottom Layer w32: U3.20 5868.56,3898.56 6010,4040 6590.75,4040 7110,4559.25 J3.3
~1: B4.2 B5.2 B7.2 BR1.2 C11.1 C12.1 C14.1 J1.3 J2.2 | length 5405.9
  Top Layer w32: J1.3 1310,1330 1450,1470 2020,1470 2240,1690 BR1.2 2410.55,1860.55 2532.8,1982.8 B5.2 2600.41,2050.41 2650,2100 C12.1 2650,2650 2580,2720 2300,2720 2234.72,2785.28 B7.2 ; B4.2 1880,2710 2117.48,2947.48 B7.2 ; C14.1 C11.1 2300,3100 2234.72,3034.72 B7.2
  Bottom Layer w32: BR1.2 2410.55,1499.45 2510,1400 3130,1400 3220,1310 J2.2@3220,1200
~2: B4.1 B6.2 BR1.4 C11.2 C13.1 J1.1 | length 3342.1
  Top Layer w32: J1.1 1340.73,1730 1440.73,1630 1610,1630 1670,1690 BR1.4 1820,1800 1583,2037 B6.2 ; C13.1 2020,2500 1727.09,2207.09 B6.2 ; C11.2 2122.8,3042.8 1777.48,2697.48 B4.1 1583.86,2696.62 1583.86,2207.95 B6.2
~3: B5.1 B6.1 BR1.3 C12.2 C13.2 J1.2 J2.1 | length 3843.4
  Top Layer w32: J1.2 1760,1530 1920,1690 BR1.3 2115.27,1875.32 2237.52,1997.56 B5.1 ; B6.1 1878.28,2138.28 1947.89,2207.89 B5.1 ; C12.2 C13.2 2300,2340 2237.52,2277.52 B5.1
  Bottom Layer w32: BR1.3 2115.27,1394.73 2180,1330 2950,1330 3020,1260 J2.1@3020,1200
pads on no net: B1.2 B2.2 P1.4 P1.MP1 P1.MP2 P2.4 P2.5 P2.6 P2.MP1 P2.MP2 P3.9 P3.10 P3.11 P3.12 P3.MH1 P3.MH2 U1.7 U1.8 U3.24 U3.25 U3.26 U4.3 U4.6 U4.7 U5.3 U5.5 U6.5 U6.6 U6.7

## Text inside footprints (layer, text, board x,y; h text height)
BR1: Top Overlay "*" at 2862.77,1715 h50 r180; Mechanical 13 "*" at 2812.77,1715 h50 r180
U2: Top Overlay "*" at 4305,1589.5 h50 r270; Mechanical 13 "*" at 4305,1539.5 h50 r270
U5: Top Overlay "*" at 6597.76,2043.52 h50 r180; Mechanical 13 "*" at 6550.76,2100.92 h50 r180